# Altium PCB PCB_monitoring_Bott_Back.PcbDoc
Units mm, origin at the board's own origin, x right, y up, seen from the top; angles counter-clockwise.
Board outline 165 x 42.5 mm, 2 copper layers (Top Layer, Bottom Layer), stack 1.571 mm thick; 31 components, 222 nets, 194 pads, 3 vias.
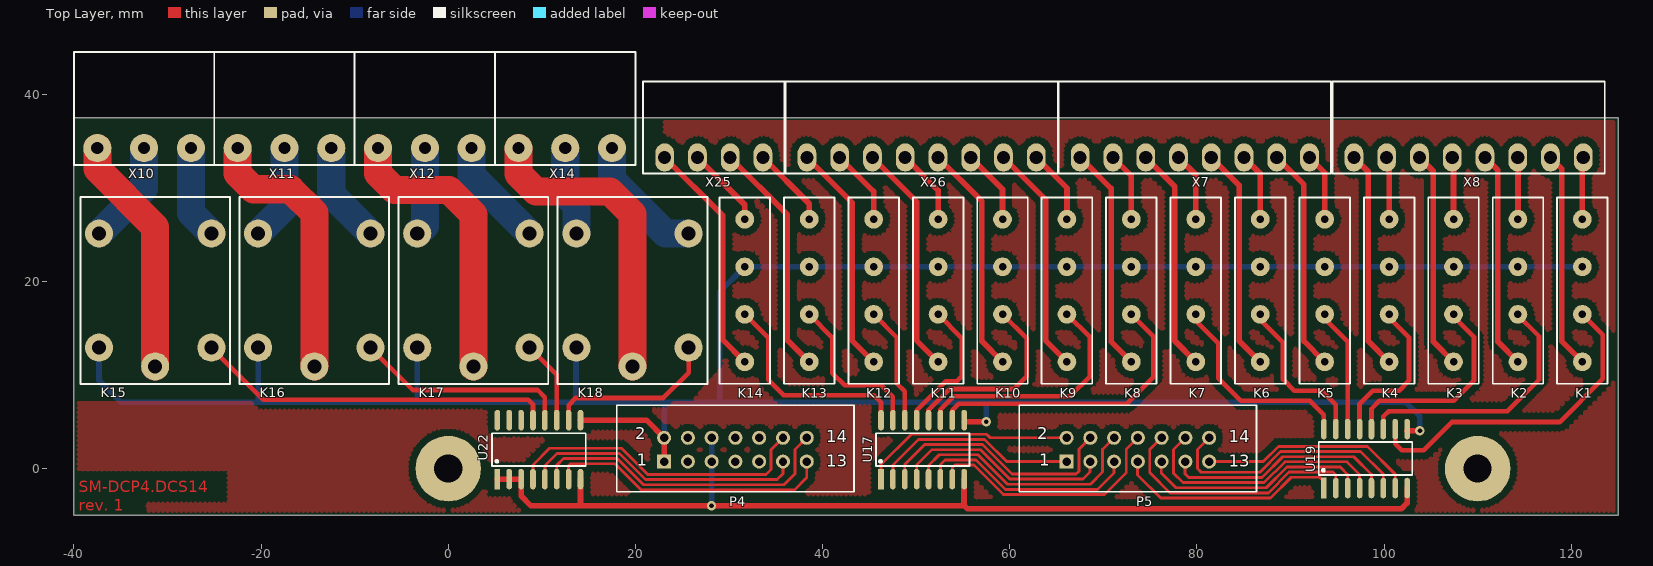
[diagram p0: Top Layer view]
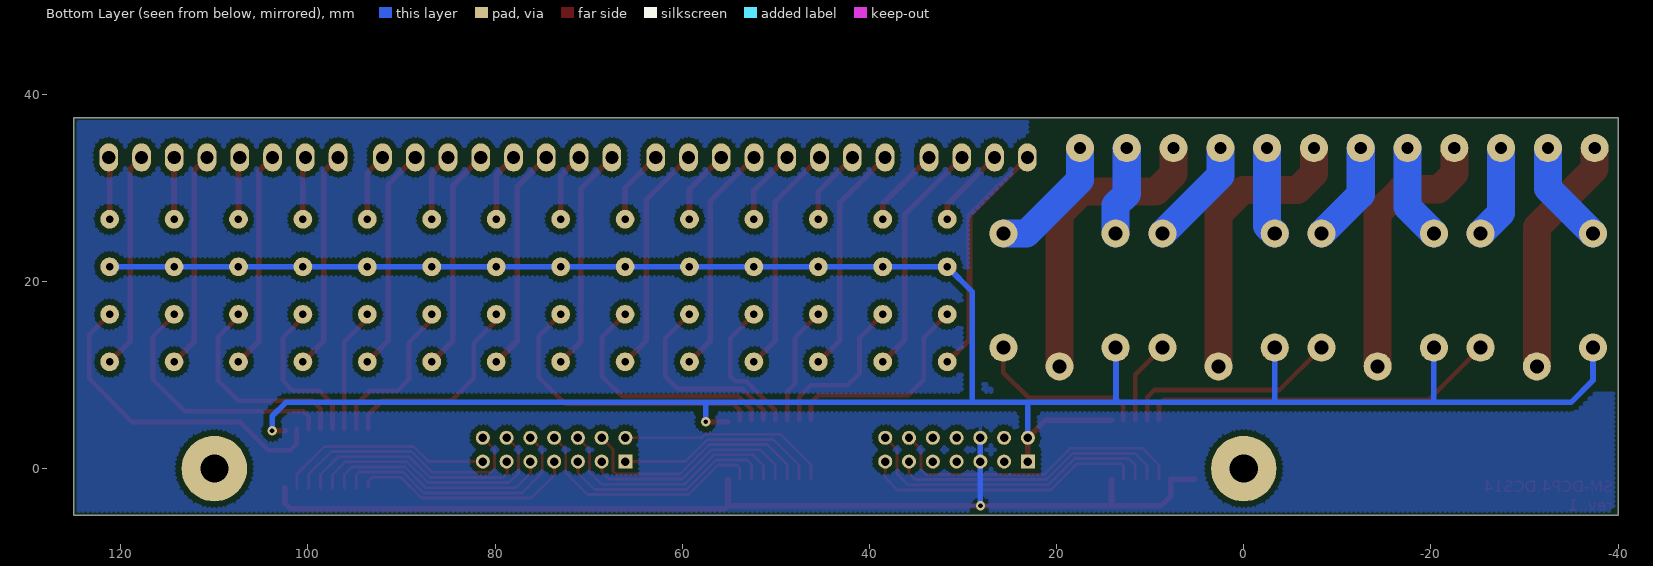
[diagram p1: Bottom Layer view, seen from below]

## Layer stack, top to bottom
Top Solder: solder mask 0.0102, Solder Resist, Dk 3.5
Top Layer: signal copper 0.0356
Dielectric 1: dielectric 1.5, FR-4, Dk 4.8
Bottom Layer: signal copper 0.0356
Bottom Solder: solder mask 0.0102, Solder Resist, Dk 3.5

## Board outline
-40,-5 125,-5 125,37.5 -40,37.5

## Design rules (kind name [scope] priority, off if disabled: settings)
Clearance Clearance_3 [InPolygon And InNetClass('GND')] p1: gap=0.4
Clearance Clearance_2 [InPolygon And OnLayer('Bottom Layer')] p2: gap=0.6
Clearance Clearance_1 [InPolygon And OnLayer('Top Layer')] p3: gap=0.7
Clearance [All] p4: gap=0.25
ComponentClearance [All] p1: gap=0 collisioncheckmode=3 verticalgap=0 showdistances=FALSE
Height [All] p1: minheight=0 maxheight=30 prefheight=12.7
HoleSize [All] p1: absolutevalues=TRUE maxlimit=5 minlimit=0.2 maxpercent=80.000 minpercent=20.000
HoleToHoleClearance [All] p1: gap=0.25 allowstackedmicrovias=TRUE
MinimumSolderMaskSliver [All] p1: minsoldermaskwidth=0
PlaneClearance [All] p1: clearance=0.5
PlaneConnect [All] p1: planeconnectstyle=Relief reliefexpansion=0.5 reliefentries=4 reliefconductorwidth=0.3 reliefairgap=0.25
PolygonConnect [All] p1: connectstyle=Relief reliefconductorwidth=0.4 reliefentries=4 polygonreliefangle="90 Angle" airgapwidth=0.4
RoutingCorners [All] p1: cornerstyle=45-Degree minsetback=2 maxsetback=2
RoutingVias [All] p1: holewidth=0.8 width=1.3 viastyle="Through Hole" minholewidth=0.3 minwidth=0.8 maxholewidth=5 maxwidth=7
SilkToBoardRegionClearance [All] p1 off:
SilkToSilkClearance [All] p1: silktosilkclearance=0
SilkToSolderMaskClearance [IsPad] p1: minsilkscreentomaskgap=0 clearancetoexposedcopper=TRUE
SolderMaskExpansion [All] p1: expansion=0.1
Width [All] p1: maxlimit=4 minlimit=0.25 preferedwidth=0.5 minimp=50.000000 maximp=50.000000 favimp=50.000000
19 further rules are at their usual default settings.

## Components (designator, comment, footprint, x,y, rotation, side; value= is the part's Value field where it differs from the comment)
K1 "BRS-1A12" R_BRS 121.186,19.024 r270 top
K2 "BRS-1A12" R_BRS 114.301,19.024 r270 top
K3 "BRS-1A12" R_BRS 107.417,19.024 r270 top
K4 "BRS-1A12" R_BRS 100.532,19.024 r270 top
K5 "BRS-1A12" R_BRS 93.648,19.024 r270 top
K6 "BRS-1A12" R_BRS 86.763,19.024 r270 top
K7 "BRS-1A12" R_BRS 79.878,19.024 r270 top
K8 "BRS-1A12" R_BRS 72.994,19.024 r270 top
K9 "BRS-1A12" R_BRS 66.109,19.024 r270 top
K10 "BRS-1A12" R_BRS 59.224,19.024 r270 top
K11 "BRS-1A12" R_BRS 52.34,19.024 r270 top
K12 "BRS-1A12" R_BRS 45.455,19.024 r270 top
K13 "BRS-1A12" R_BRS 38.571,19.024 r270 top
K14 "BRS-1A12" R_BRS 31.686,19.024 r270 top
K15 "JQC-3F-DC12VH-15A" BS-115C-12A -31.314,19.024 r90 top
K16 "JQC-3F-DC12VH-15A" BS-115C-12A -14.314,19.024 r90 top
K17 "JQC-3F-DC12VH-15A" BS-115C-12A 2.686,19.024 r90 top
K18 "JQC-3F-DC12VH-15A" BS-115C-12A 19.686,19.024 r90 top
P4 "BH-14" BH-14 30.686,2.024 r0 top
P5 "BH-14" BH-14 73.686,2.024 r0 top
U17 "ULN2003A" SO-16_N 50.686,2.024 r90 top
U19 "ULN2003A" SO-16_N 98.011,1.074 r90 top
U22 "ULN2003A" SO-16_N 9.686,2.024 r90 top
X7 "15EDGRC-3.5-08P" MC_3.5_8 79.775,33.25 r180 top
X8 "15EDGRC-3.5-08P" MC_3.5_8 109.025,33.25 r180 top
X10 "2EDGR-5.0-03P" 2EDGR-5.0-03P -32.5,34.25 r0 top
X11 "2EDGR-5.0-03P" 2EDGR-5.0-03P -17.5,34.25 r0 top
X12 "2EDGR-5.0-03P" 2EDGR-5.0-03P -2.5,34.25 r0 top
X14 "2EDGR-5.0-03P" 2EDGR-5.0-03P 12.5,34.25 r0 top
X25 "15EDGRC-3.5-04P" MC_3.5_4 28.375,33.25 r180 top
X26 "15EDGRC-3.5-08P" MC_3.5_8 50.575,33.25 r180 top

## Footprints (in the part's own frame and the unit in brackets; to place one, negate y for a bottom-side part, rotate by r counter-clockwise, add the part's x,y. Pads: shape width x height; smd on the part's side, far side on the other; paste and mask are expansions set on the pad)
2EDGR-5.0-03P [mm]
  round 3 hole 1.3: 1(-5,0) 2(0,0) 3(5,0)
  silkscreen extent -7.5,-1.82 7.5,10.28, body extent -7.5,-1.75 7.5,10.25, height 8.47
BH-14 [mm] "Connector IDC"
  rect 1.5x1.5 hole 0.9: 1(-7.62,-1.27)
  round 1.5 hole 0.9: 2(-7.62,1.27) 3(-5.08,-1.27) 4(-5.08,1.27) 5(-2.54,-1.27) 6(-2.54,1.27) 7(0,-1.27) 8(0,1.27) 9(2.54,-1.27) 10(2.54,1.27) 11(5.08,-1.27) 12(5.08,1.27) 13(7.62,-1.27) 14(7.62,1.27)
  silkscreen extent -12.68,-4.5 12.68,4.75, body extent -12.69,-4.4 12.69,4.7, height 9.3
BS-115C-12A [mm]
  round 3 hole 1.5: 1(-6.1,6) 2(-6.1,-6) 3(-8.1,0) 4(6.1,6) 5(6.1,-6)
  silkscreen extent -10,-8 10,8, body extent -9.75,-7.95 9.75,7.95, height 15
MC_3.5_4 [mm]
  oval 2x3 hole 1.4: 1(-5.25,0) 2(-1.75,0) 3(1.75,0) 4(5.25,0)
  silkscreen extent -7.55,-8.1 7.55,1.7, body extent -7.4,-8 7.4,1.2, height 7.2
MC_3.5_8 [mm]
  oval 2x3 hole 1.4: 1(-12.25,0) 2(-8.75,0) 3(-5.25,0) 4(-1.75,0) 5(1.75,0) 6(5.25,0) 7(8.75,0) 8(12.25,0)
  silkscreen extent -14.55,-8.1 14.55,1.7, body extent -14.4,-7.95 14.4,1.25, height 7.2
R_BRS [mm]
  round 2 hole 0.8: 1(-7.62,0) 3(-2.54,0) 5(2.54,0) 7(7.62,0)
  silkscreen extent -9.95,-2.7 9.95,2.7, body extent -9.52,-2.56 9.53,2.55, height 7.8
SO-16_N [mm] "16-Pin Small Outline Integrated Circuit 1.27 mm Pitch, IPC Medium Density"
  rect 2.2x0.6 smd: 1(-3.15,4.445)
  oval 2.2x0.6 smd: 2(-3.15,3.175) 3(-3.15,1.905) 4(-3.15,0.635) 5(-3.15,-0.635) 6(-3.15,-1.905) 7(-3.15,-3.175) 8(-3.15,-4.445) 9(3.15,-4.445) 10(3.15,-3.175) 11(3.15,-1.905) 12(3.15,-0.635) 13(3.15,0.635) 14(3.15,1.905) 15(3.15,3.175) 16(3.15,4.445)
  silkscreen extent -1.75,-5 1.75,5, body extent -3,-5.1 3,5.1, height 1.7

## Part data
K1 K2 K3 K4 K5 K6 K7 K8 K9 K10 K11 K12 K13 K14: "1A, 10Vdc, 1 pole, SIP terminal"
K15 K16 K17 K18: library part JQC-3F-DC12VH-7A, "7A 240Vac 1 pole Slim relay"
P4 P5: "IDC/BH"
U17 U19 U22: "Darlington Transistor Arrays"
X7 X8 X26: library part MC_3.5_8, "Connector 3.5mm"
X10 X11 X12 X14: "Connector 5mm"
X25: library part MC_3.5_4, "Connector 3.5mm"

## Free pads (board coordinates)
  round 7 hole 3: 0(0,0) 0(110,0)

## Via types
v1: diameter 1, hole 0.5, Top Layer to Bottom Layer, 3 vias

## Nets (pads, with @x,y where several pads share a name; then routed paths per layer and width w, separated by ;. In a path a pad name is that pad's centre, name@x,y a point inside that pad or via, vN(x,y) a via of type N, cw(c..) or ccw(c..) an arc to the next point about the centre after c; other vN are vias at no path point)
1-WIRE1: 
1-WIRE1_T: 
1-WIRE2: 
1-WIRE2_T: 
1-WIRE3: 
1-WIRE3_T: 
3.3V: 
3.3V_T: 
5V: 
5V_BUS: 
5V_CPU: 
5V_T: 
12V: 
12V_B: K1.3 K2.3 K3.3 K4.3 K5.3 K6.3 K7.3 K8.3 K9.3 K10.3 K11.3 K12.3 K13.3 K14.3 K15.1 K16.1 K17.1 K18.1 P4.1 P4.2 U17.9 U19.9 U22.9 | length 291
  Top Layer w0.6: U22.9 21.186,5.174 P4.2 P4.1 ; U17.9@55.15,5 v1(57.5,5) ; U19.9@102.45,4.05 v1(103.825,4.05)
  Bottom Layer w0.6: K15.1 -37.314,9.439 -34.95,7.075 -20.35,7.075 ; K16.1 -20.314,7.111 -20.35,7.075 ; K17.1 -3.314,7.089 -3.3,7.075 ; K18.1 13.65,12.888 13.65,7.075 ; P4.2 23.066,7.066 23.075,7.075 ; v1(57.5,5) 57.5,7.075 ; K7.3 K8.3 K9.3 K10.3 K11.3 K12.3 K13.3 K14.3 29,18.878 29,7.075 ; K7.3@80.186,21.564 K6.3@86.186,21.564 ; K6.3@87.186,21.564 K1.3 ; v1(103.825,4.05) 103.825,5.6 102.35,7.075 57.5,7.075 ; -20.35,7.075 -3.3,7.075 ; -3.3,7.075 13.65,7.075 ; 13.65,7.075 23.075,7.075 ; 23.075,7.075 29,7.075 ; 29,7.075 57.5,7.075
12V_EXT: 
12V_EXT_T: 
12V_IN1: 
12V_IN2: 
12V_INT: 
A: 
B: 
B_OPR1: P4.13 U22.7 | length 30.4
  Top Layer w0.3: U22.7 12.861,0.324 13.061,0.524 17.826,0.524 20.626,-2.276 36.986,-2.276 38.306,-0.956 P4.13
B_OPR2: P4.14 U22.6 | length 33.2
  Top Layer w0.3: U22.6 11.591,0.354 12.311,1.074 18.054,1.074 20.854,-1.726 35.861,-1.726 37.036,-0.551 37.036,2.024 P4.14
B_OPR3: P4.11 U22.5 | length 30.2
  Top Layer w0.3: U22.5 10.321,0.334 11.611,1.624 18.282,1.624 21.082,-1.176 35.146,-1.176 35.766,-0.556 P4.11
B_OPR4: P4.12 U22.4 | length 33
  Top Layer w0.3: U22.4 9.051,0.389 10.836,2.174 18.509,2.174 21.309,-0.626 33.961,-0.626 34.486,-0.101 34.486,2.014 P4.12
B_OSR1: P5.13 U19.7 | length 23.3
  Top Layer w0.3: P5.13 87.091,0.754 88.711,2.374 98.211,2.374 101.186,-0.601 U19.7
B_OSR2: P5.14 U19.6 | length 27.2
  Top Layer w0.3: P5.14 80.061,2.049 80.061,-0.001 80.456,-0.396 86.719,-0.396 88.939,1.824 97.486,1.824 99.916,-0.606 U19.6
B_OSR3: P5.11 U19.5 | length 24.6
  Top Layer w0.3: P5.11 78.736,0.724 78.736,-0.551 79.131,-0.946 86.947,-0.946 89.167,1.274 96.761,1.274 98.646,-0.611 U19.5
B_OSR4: P5.12 U19.4 | length 27.5
  Top Layer w0.3: P5.12 77.511,2.039 77.511,-0.501 78.506,-1.496 87.174,-1.496 89.394,0.724 96.036,0.724 97.376,-0.616 U19.4
B_OSR5: P5.9 U19.3 | length 24.5
  Top Layer w0.3: P5.9 76.186,0.714 76.186,-0.451 77.781,-2.046 87.402,-2.046 89.622,0.174 95.311,0.174 96.106,-0.621 U19.3
B_OSR6: P5.10 U19.2 | length 27.5
  Top Layer w0.3: P5.10 74.961,2.029 74.961,-0.426 77.131,-2.596 87.63,-2.596 89.85,-0.376 94.536,-0.376 94.836,-0.676 U19.2
B_OSR7: P5.7 U19.1 | length 24.2
  Top Layer w0.3: P5.7 73.661,0.729 73.661,-0.676 76.131,-3.146 87.858,-3.146 90.078,-0.926 93.111,-0.926 93.566,-1.381 U19.1
B_OSR8: P5.8 U17.7 | length 26.4
  Top Layer w0.3: U17.7 53.861,0.099 54.136,0.374 56.161,0.374 59.311,-2.776 70.111,-2.776 72.436,-0.451 72.436,2.044 P5.8
B_OSR9: P5.5 U17.6 | length 23.6
  Top Layer w0.3: U17.6 52.591,0.429 53.086,0.924 56.389,0.924 59.539,-2.226 69.386,-2.226 71.146,-0.466 P5.5
B_OSR10: P5.6 U17.5 | length 26.5
  Top Layer w0.3: U17.5 51.321,0.334 52.461,1.474 56.617,1.474 59.767,-1.676 68.611,-1.676 69.911,-0.376 69.911,2.059 P5.6
B_OSR11: P5.3 U17.4 | length 23.5
  Top Layer w0.3: U17.4 50.051,0.389 51.686,2.024 56.844,2.024 59.994,-1.126 67.836,-1.126 68.586,-0.376 68.586,0.734 P5.3
B_OSR12: P5.4 U17.3 | length 26.6
  Top Layer w0.3: U17.3 48.781,0.444 50.911,2.574 57.072,2.574 60.222,-0.576 67.086,-0.576 67.386,-0.276 67.386,2.074 P5.4
B_OSR13: P5.1 U17.2 | length 22.2
  Top Layer w0.3: U17.2 47.511,0.399 50.236,3.124 57.3,3.124 59.67,0.754 P5.1
B_OSR14: P5.2 U17.1 | length 22.9
  Top Layer w0.3: U17.1 46.241,0.429 49.486,3.674 57.528,3.674 57.908,3.294 P5.2
C_OPR1: K18.2 U22.10 | length 18.5
  Top Layer w0.5: U22.10 12.861,6.774 13.636,7.549 22.986,7.549 25.686,10.249 K18.2
C_OPR2: K17.2 U22.11 | length 9
  Top Layer w0.5: K17.2 11.591,10.019 U22.11
C_OPR3: K16.2 U22.12 | length 23.3
  Top Layer w0.5: K16.2 -3.789,8.399 9.561,8.399 10.321,7.639 U22.12
C_OPR4: K15.2 U22.13 | length 38.6
  Top Layer w0.5: K15.2 -19.764,7.374 8.561,7.374 9.051,6.884 U22.13
C_OSR1: K1.5 U19.10 | length 35
  Top Layer w0.5: U19.10 101.186,2.664 101.875,1.975 104.25,1.975 107.25,4.975 118.762,4.975 123.375,9.588 123.375,14.295 K1.5
C_OSR2: K2.5 U19.11 | length 27.6
  Top Layer w0.5: U19.11 99.916,5.566 100.475,6.125 113.175,6.125 116.55,9.5 116.55,14.12 K2.5@114.186,16.484
C_OSR3: K3.5 U19.12 | length 22.5
  Top Layer w0.5: U19.12 98.65,4.228 98.65,6.4 99.5,7.25 107.45,7.25 109.6,9.4 109.6,14.07 K3.5@107.186,16.484
C_OSR4: K4.5 U19.13 | length 17.1
  Top Layer w0.5: U19.13 97.376,6.926 98.775,8.325 101.6,8.325 102.65,9.375 102.65,14.02 K4.5@100.186,16.484
C_OSR5: K5.5 U19.14 | length 13.5
  Top Layer w0.5: K5.5@93.186,16.484 96.1,13.57 U19.14@96.1,4.224
C_OSR6: K6.5 U19.15 | length 17.6
  Top Layer w0.5: K6.5@86.186,16.484 89.2,13.47 89.2,9.525 90.4,8.325 93.325,8.325 94.836,6.814 U19.15
C_OSR7: K7.5 U19.16 | length 22.6
  Top Layer w0.5: K7.5@79.186,16.484 82.275,13.395 82.275,9.65 84.675,7.25 92.075,7.25 93.566,5.759 U19.16
C_OSR8: K8.5 U17.10 | length 31.7
  Top Layer w0.5: U17.10 53.861,6.236 54.55,6.925 72.5,6.925 75.325,9.75 75.325,14.153 K8.5
C_OSR9: K9.5 U17.11 | length 26.2
  Top Layer w0.5: U17.11 52.591,6.291 54.025,7.725 66.425,7.725 68.575,9.875 68.575,14.018 K9.5
C_OSR10: K10.5 U17.12 | length 20.7
  Top Layer w0.5: U17.12 51.321,6.271 53.55,8.5 60.425,8.5 61.8,9.875 61.8,13.908 K10.5
C_OSR11: K11.5 U17.13 | length 15.1
  Top Layer w0.5: U17.13 50.051,6.251 53.15,9.35 54.35,9.35 54.875,9.875 54.875,13.949 K11.5
C_OSR12: K12.5 U17.14 | length 12.7
  Top Layer w0.5: K12.5 47.95,13.989 47.95,9.075 48.781,8.244 U17.14
C_OSR13: K13.5 U17.15 | length 17.3
  Top Layer w0.5: K13.5 41.05,14.005 41.05,10.2 42.35,8.9 46.275,8.9 47.511,7.664 U17.15
C_OSR14: K14.5 U17.16 | length 23
  Top Layer w0.5: K14.5 34.175,13.995 34.175,9.5 35.825,7.85 45.475,7.85 46.241,7.084 U17.16
DCI1: 
DCI2: 
DCI3: 
DCI4: 
DCI5: 
DCI6: 
DCI7: 
DCI8: 
DI1: 
DI2: 
DI3: 
DI4: 
DI5: 
DI6: 
DI7: 
DI8: 
FA: 
FB\: 
FY: 
FZ\: 
GND: 
GND_B: P4.5 P4.6 U17.8 U19.8 U22.1 U22.2 U22.3 U22.8 | length 114.4
  Top Layer w0.6: U22.1 U22.3 7.781,-2.896 8.861,-3.976 14.136,-3.976 ; U22.8 14.136,-1.131 14.136,-3.976 ; 55.111,-3.976 14.136,-3.976 ; U17.8 55.111,-1.146 55.111,-3.911 55.5,-4.3 101.825,-4.3 102.456,-3.669 U19.8
  Bottom Layer w0.6: v1@28.146,-3.975 P4.5 P4.6
  other v1: 28.125,-3.975
GND_BUS: 
GND_EXT: 
GND_EXT_T: 
GND_OD: 
GND_T: 
IN_A1: 
IN_A2: 
IN_ADC1: 
IN_ADC2: 
IN_D1: 
IN_D2: 
IN_D3: 
IN_D4: 
IN_D5: 
IN_D5_T: 
IN_D6: 
IN_D6_T: 
IN_D7: 
IN_D7_T: 
IN_D8: 
IN_D8_T: 
ISR1: 
ISR1_T: 
ISR2: 
ISR2_T: 
ISR3: 
ISR3_T: 
ISR4: 
ISR4_T: 
ISR5: 
ISR6: 
ISR7: 
ISR8: 
LED_OD: 
NetC2_2: 
NetC3_1: 
NetC6_2: 
NetC11_1: 
NetC12_2: 
NetC13_2: 
NetC16_1: 
NetC17_1: 
NetC18_1: 
NetC19_1: 
NetC22_1: 
NetC23_1: 
NetC24_1: 
NetC25_1: 
NetC26_1: 
NetC27_1: 
NetC28_2: 
NetC29_1: 
NetC30_2: 
NetC31_1: 
NetC32_1: 
NetC34_1: 
NetC36_1: 
NetC38_1: 
NetD4_2: 
NetDS1_2: 
NetDS2_1: 
NetDS2_2: 
NetDS3_1: 
NetDS3_2: 
NetK1_1: K1.1 X8.1 | length 6.6
  Top Layer w0.6: K1.1 121.186,33.161 X8.1
NetK1_7: K1.7 X8.2 | length 23.3
  Top Layer w0.6: X8.2 119,32.025 119,13.59 K1.7
NetK2_1: K2.1 X8.3 | length 6.6
  Top Layer w0.6: X8.3 114.301,33.224 K2.1
NetK2_7: K2.7 X8.4 | length 23.3
  Top Layer w0.6: X8.4 112.15,31.875 112.15,13.555 K2.7
NetK3_1: K3.1 X8.5 | length 6.7
  Top Layer w0.6: X8.5 107.417,33.108 K3.1
NetK3_7: K3.7 X8.6 | length 23.4
  Top Layer w0.6: X8.6 105.25,31.775 105.25,13.571 K3.7
NetK4_1: K4.1 X8.7 | length 6.7
  Top Layer w0.6: X8.7 100.532,32.993 K4.1
NetK4_7: K4.7 X8.8 | length 23.4
  Top Layer w0.6: X8.8 98.3,31.725 98.3,13.636 K4.7
NetK5_1: K5.1 X7.1 | length 7.3
  Top Layer w0.6: X7.1 93.648,31.627 K5.1
NetK5_7: K5.7 X7.2 | length 24
  Top Layer w0.6: X7.2 91.425,30.35 91.425,13.627 K5.7
NetK6_1: K6.1 X7.3 | length 7.3
  Top Layer w0.6: X7.3 86.763,31.512 K6.1
NetK6_7: K6.7 X7.4 | length 24
  Top Layer w0.6: X7.4 84.5,30.275 84.5,13.667 K6.7
NetK7_1: K7.1 X7.5 | length 7.4
  Top Layer w0.6: X7.5 79.878,31.397 K7.1
NetK7_7: K7.7 X7.6 | length 24.1
  Top Layer w0.6: X7.6 77.625,30.15 77.625,13.657 K7.7
NetK8_1: K8.1 X7.7 | length 7.4
  Top Layer w0.6: X7.7 72.994,31.281 K8.1
NetK8_7: K8.7 X7.8 | length 24.1
  Top Layer w0.6: X7.8 70.825,29.95 70.825,13.573 K8.7
NetK9_1: K9.1 X26.1 | length 8
  Top Layer w0.6: X26.1 66.109,29.966 K9.1
NetK9_7: K9.7 X26.2 | length 24.7
  Top Layer w0.6: X26.2 63.825,28.75 63.825,13.688 K9.7
NetK10_1: K10.1 X26.3 | length 8
  Top Layer w0.6: X26.3 59.224,29.851 K10.1
NetK10_7: K10.7 X26.4 | length 24.7
  Top Layer w0.6: X26.4 57,28.575 57,13.628 K10.7
NetK11_1: K11.1 X26.5 | length 8.1
  Top Layer w0.6: X26.5 52.34,29.735 K11.1
NetK11_7: K11.7 X26.6 | length 24.8
  Top Layer w0.6: X26.6 50.05,28.525 50.05,13.694 K11.7
NetK12_1: K12.1 X26.7 | length 8.1
  Top Layer w0.6: X26.7 45.455,29.62 K12.1
NetK12_7: K12.7 X26.8 | length 24.8
  Top Layer w0.6: X26.8 43.15,28.425 43.15,13.709 K12.7
NetK13_1: K13.1 X25.1 | length 8.7
  Top Layer w0.6: X25.1 38.571,28.304 K13.1
NetK13_7: K13.7 X25.2 | length 25.3
  Top Layer w0.6: X25.2 36.225,27.15 36.225,13.75 K13.7
NetK14_1: K14.1 X25.3 | length 8.7
  Top Layer w0.6: X25.3 31.686,28.189 K14.1
NetK14_7: K14.7 X25.4 | length 25.4
  Top Layer w0.6: X25.4 29.3,27.075 29.3,13.79 K14.7
NetK15_3: K15.3 X10.1 | length 25.9
  Top Layer w3: X10.1 -37.5,32 -31.314,25.814 K15.3
NetK15_4: K15.4 X10.2 | length 11.1
  Bottom Layer w3: K15.4 -32.5,29.938 X10.2
NetK15_5: K15.5 X10.3 | length 10
  Bottom Layer w3: X10.3 -27.5,27.31 K15.5
NetK16_3: K16.3 X11.1 | length 29
  Top Layer w3: X11.1 -22.5,31.525 -20.825,29.85 -16.85,29.85 -14.314,27.314 K16.3
NetK16_4: K16.4 X11.2 | length 10.3
  Bottom Layer w3: K16.4 -17.5,27.938 X11.2
NetK16_5: K16.5 X11.3 | length 10.9
  Bottom Layer w3: X11.3 -12.5,29.31 K16.5
NetK17_3: K17.3 X12.1 | length 30.9
  Top Layer w3: X12.1 -7.5,31.525 -5.725,29.75 0.075,29.75 2.686,27.139 K17.3
NetK17_4: K17.4 X12.2 | length 9.5
  Bottom Layer w3: K17.4 -2.5,25.938 X12.2
NetK17_5: K17.5 X12.3 | length 11.7
  Bottom Layer w3: X12.3 2.5,31.31 K17.5
NetK18_3: K18.3 X14.1 | length 33
  Top Layer w3: X14.1 7.5,31.475 9.375,29.6 17.275,29.6 19.686,27.189 K18.3
NetK18_4: K18.4 X14.2 | length 9.6
  Bottom Layer w3: X14.2 12.5,29.35 13.686,28.164 K18.4
NetK18_5: K18.5 X14.3 | length 14
  Bottom Layer w3: X14.3 17.5,30.85 23.226,25.124 K18.5
NetP1_2: 
NetR3_2: 
NetR52_1: 
NetR53_1: 
NetR57_2: 
NetR58_2: 
NetR60_1: 
NetU5_2: 
NetU29_1: 
NetU29_4: 
NetU31_2: 
NetU31_3: 
NRST: 
OD: 
OPR1: 
OPR2: 
OPR3: 
OPR4: 
OSR1: 
OSR2: 
OSR3: 
OSR4: 
OSR5: 
OSR6: 
OSR7: 
OSR8: 
OSR9: 
OSR10: 
OSR11: 
OSR12: 
OSR13: 
OSR14: 
SWCLK: 
SWDIO: 
USART1_DE: 
USART1_RX: 
USART1_TX: 
USART2_RX: 
USART2_TX: 
pads on no net: P4.3 P4.4 P4.7 P4.8 P4.9 P4.10 U22.14 U22.15 U22.16

## Polygon pours and split planes (outlines as drawn)
GND_B on Bottom Layer "polygon_fill" (hatched 90Degree grid 0.5 track 0.5, pour order 4): -39.5,-4.5 124.5,-4.5 124.5,37 23.125,37 23.125,33.25 29.5,26.875 29.5,21.5 29.5,11 26.5,8 -39.5,8
no net on Top Layer "polygon_fill" (hatched 90Degree grid 0.5 track 0.5, pour order 3): -39.5,-4.5 124.5,-4.5 124.5,37 23.125,37 23.125,33.25 29.5,26.875 29.5,21.5 29.5,11 26,7 -39.5,7

## Other copper
Top Layer:
  text "SM-DCP4.DCS14" at -39.5,-2.5 h1.2
  text "rev. 1" at -39.5,-4.5 h1.2

## Silkscreen, mask and mechanical layers (free items; w line width, h text height)
Mechanical 3:
  the board outline again, w0.2

## Text inside footprints (layer, text, board x,y; h text height)
P4: Top Overlay "1" at 20.156,0.324 h1.27; Top Overlay "2" at 19.956,3.124 h1.27; Top Overlay "13" at 40.416,0.224 h1.27; Top Overlay "14" at 40.391,2.824 h1.27
P5: Top Overlay "1" at 63.156,0.324 h1.27; Top Overlay "2" at 62.956,3.124 h1.27; Top Overlay "13" at 83.416,0.224 h1.27; Top Overlay "14" at 83.391,2.824 h1.27